# Altium PCB Tow_FOC.PcbDoc (part 1 of 3)
Units mil, origin at the board's own origin, x right, y up, seen from the top; angles counter-clockwise.
Board outline 3149.61 x 2165.35 mil, 4 copper layers (Top Layer, Layer 1, Layer 2, Bottom Layer), stack 23.756 mil thick; 186 components, 138 nets, 677 pads, 434 vias.
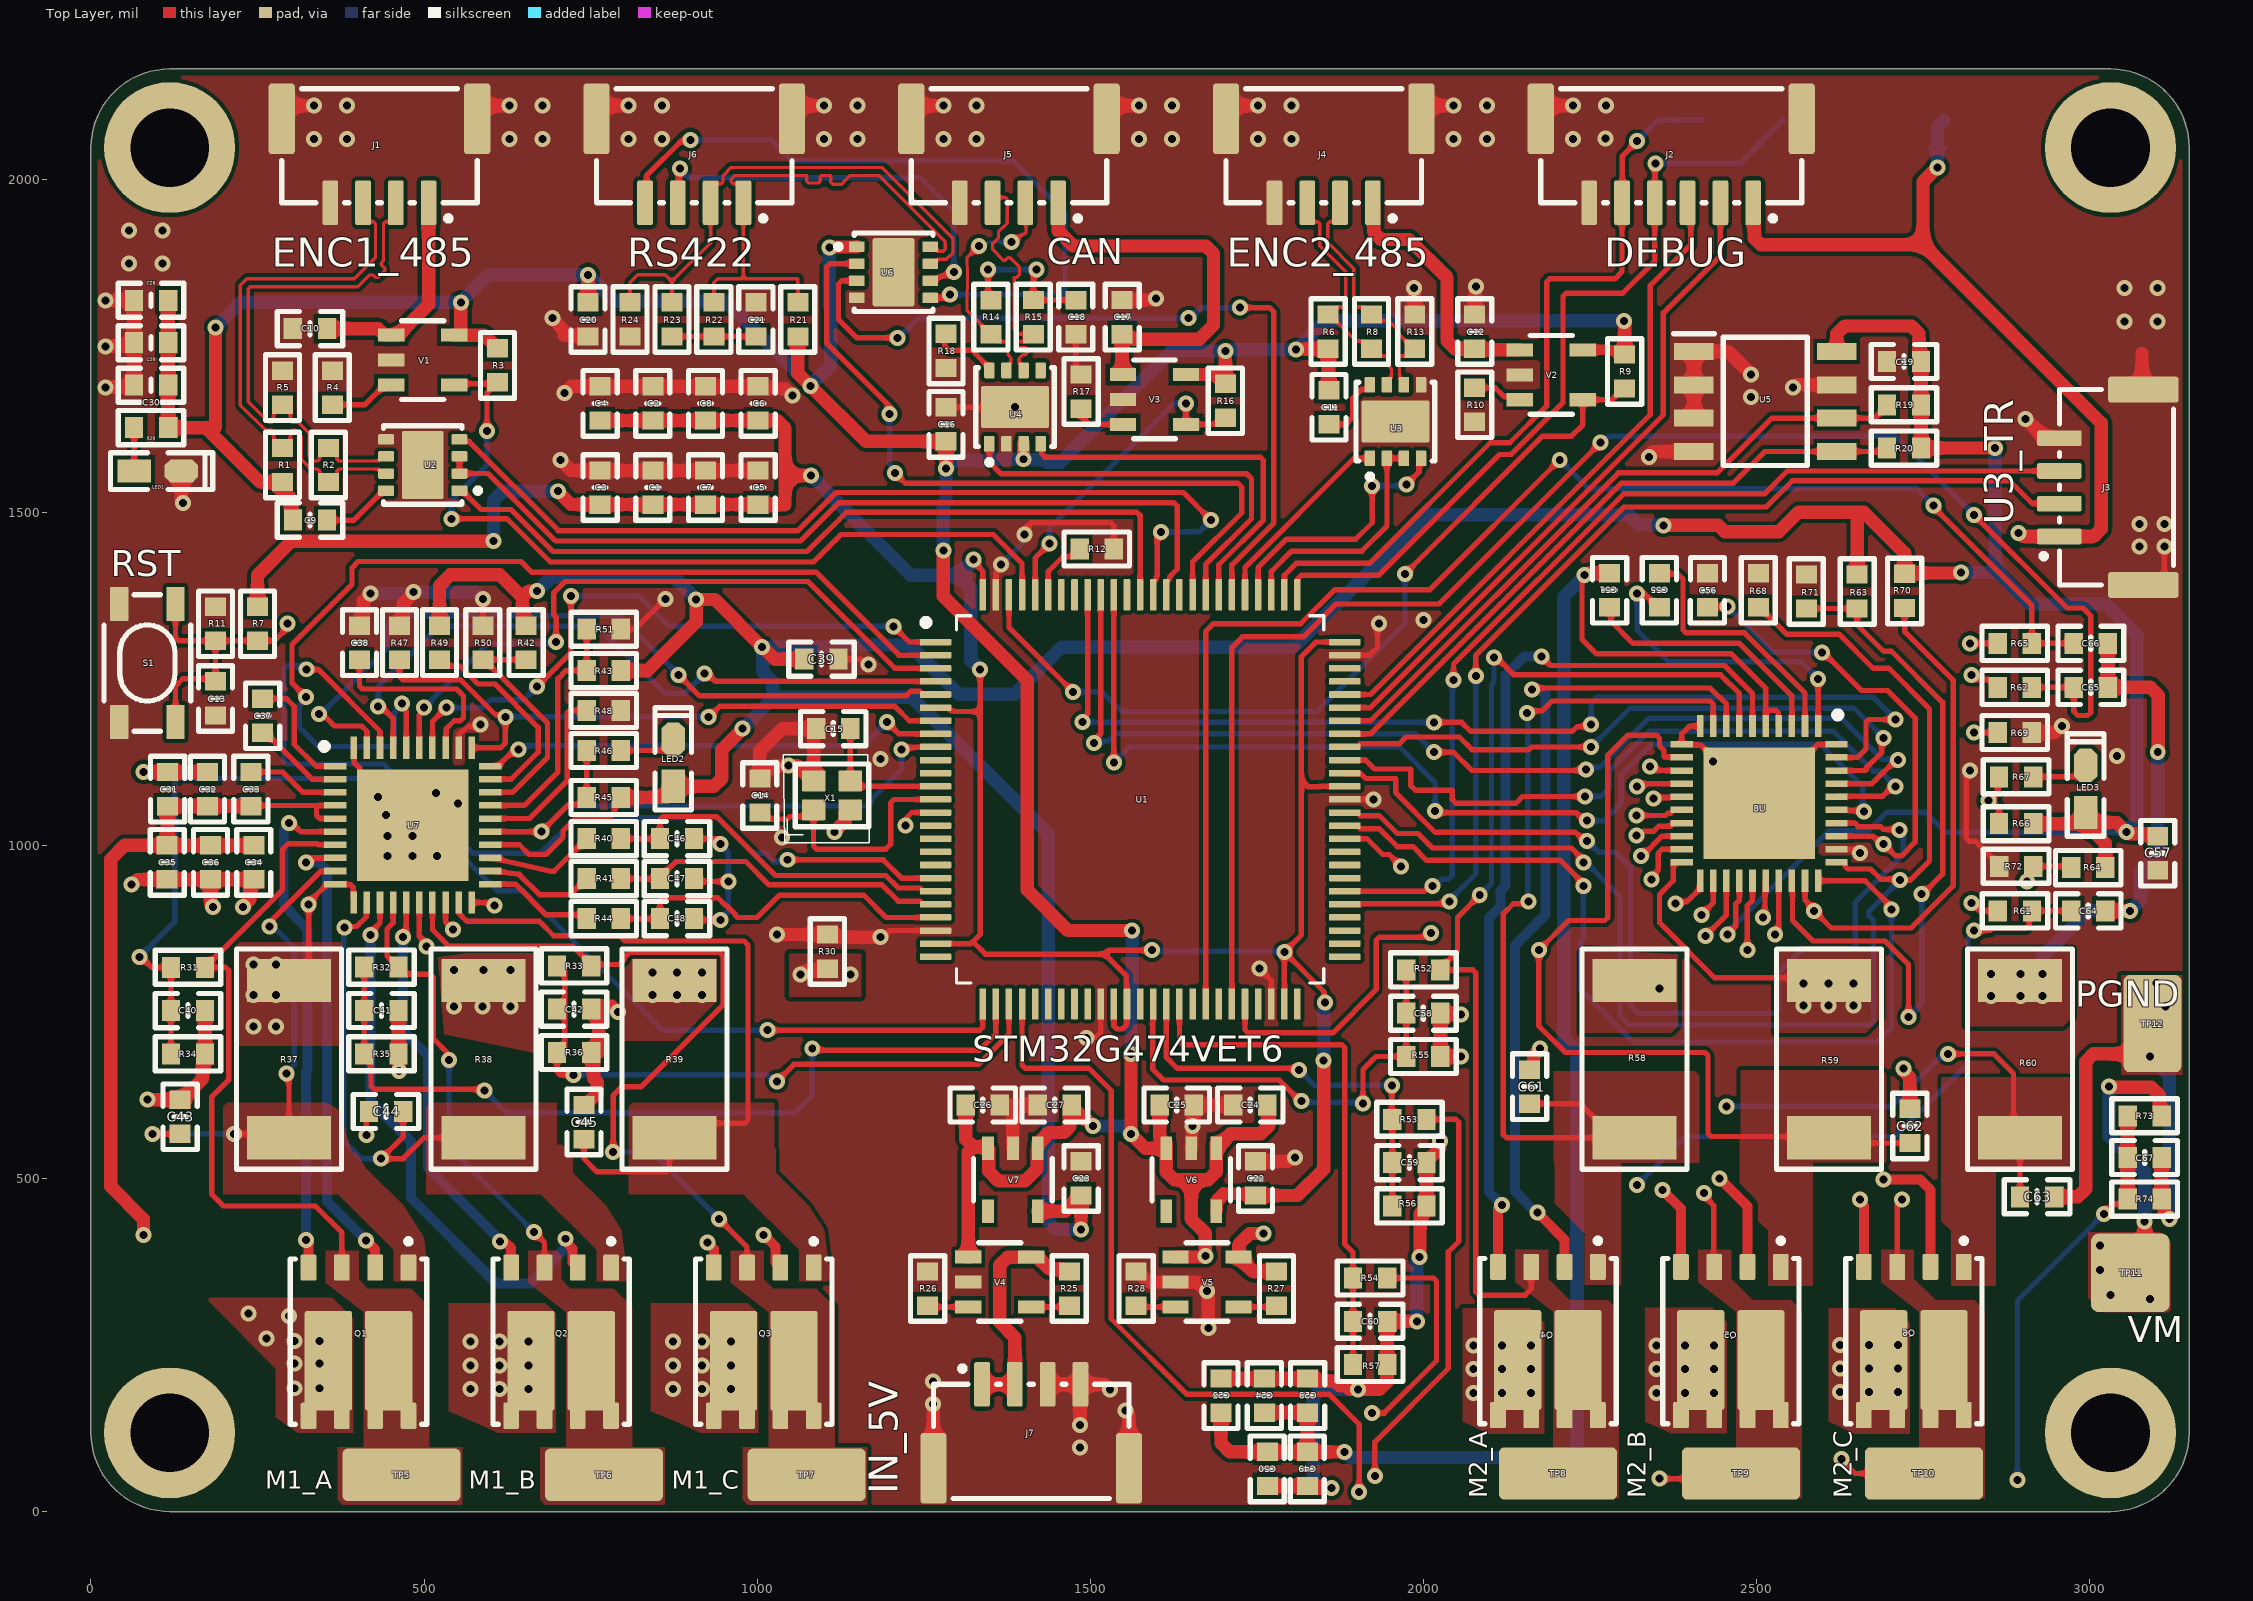
[diagram p0: Top Layer view]
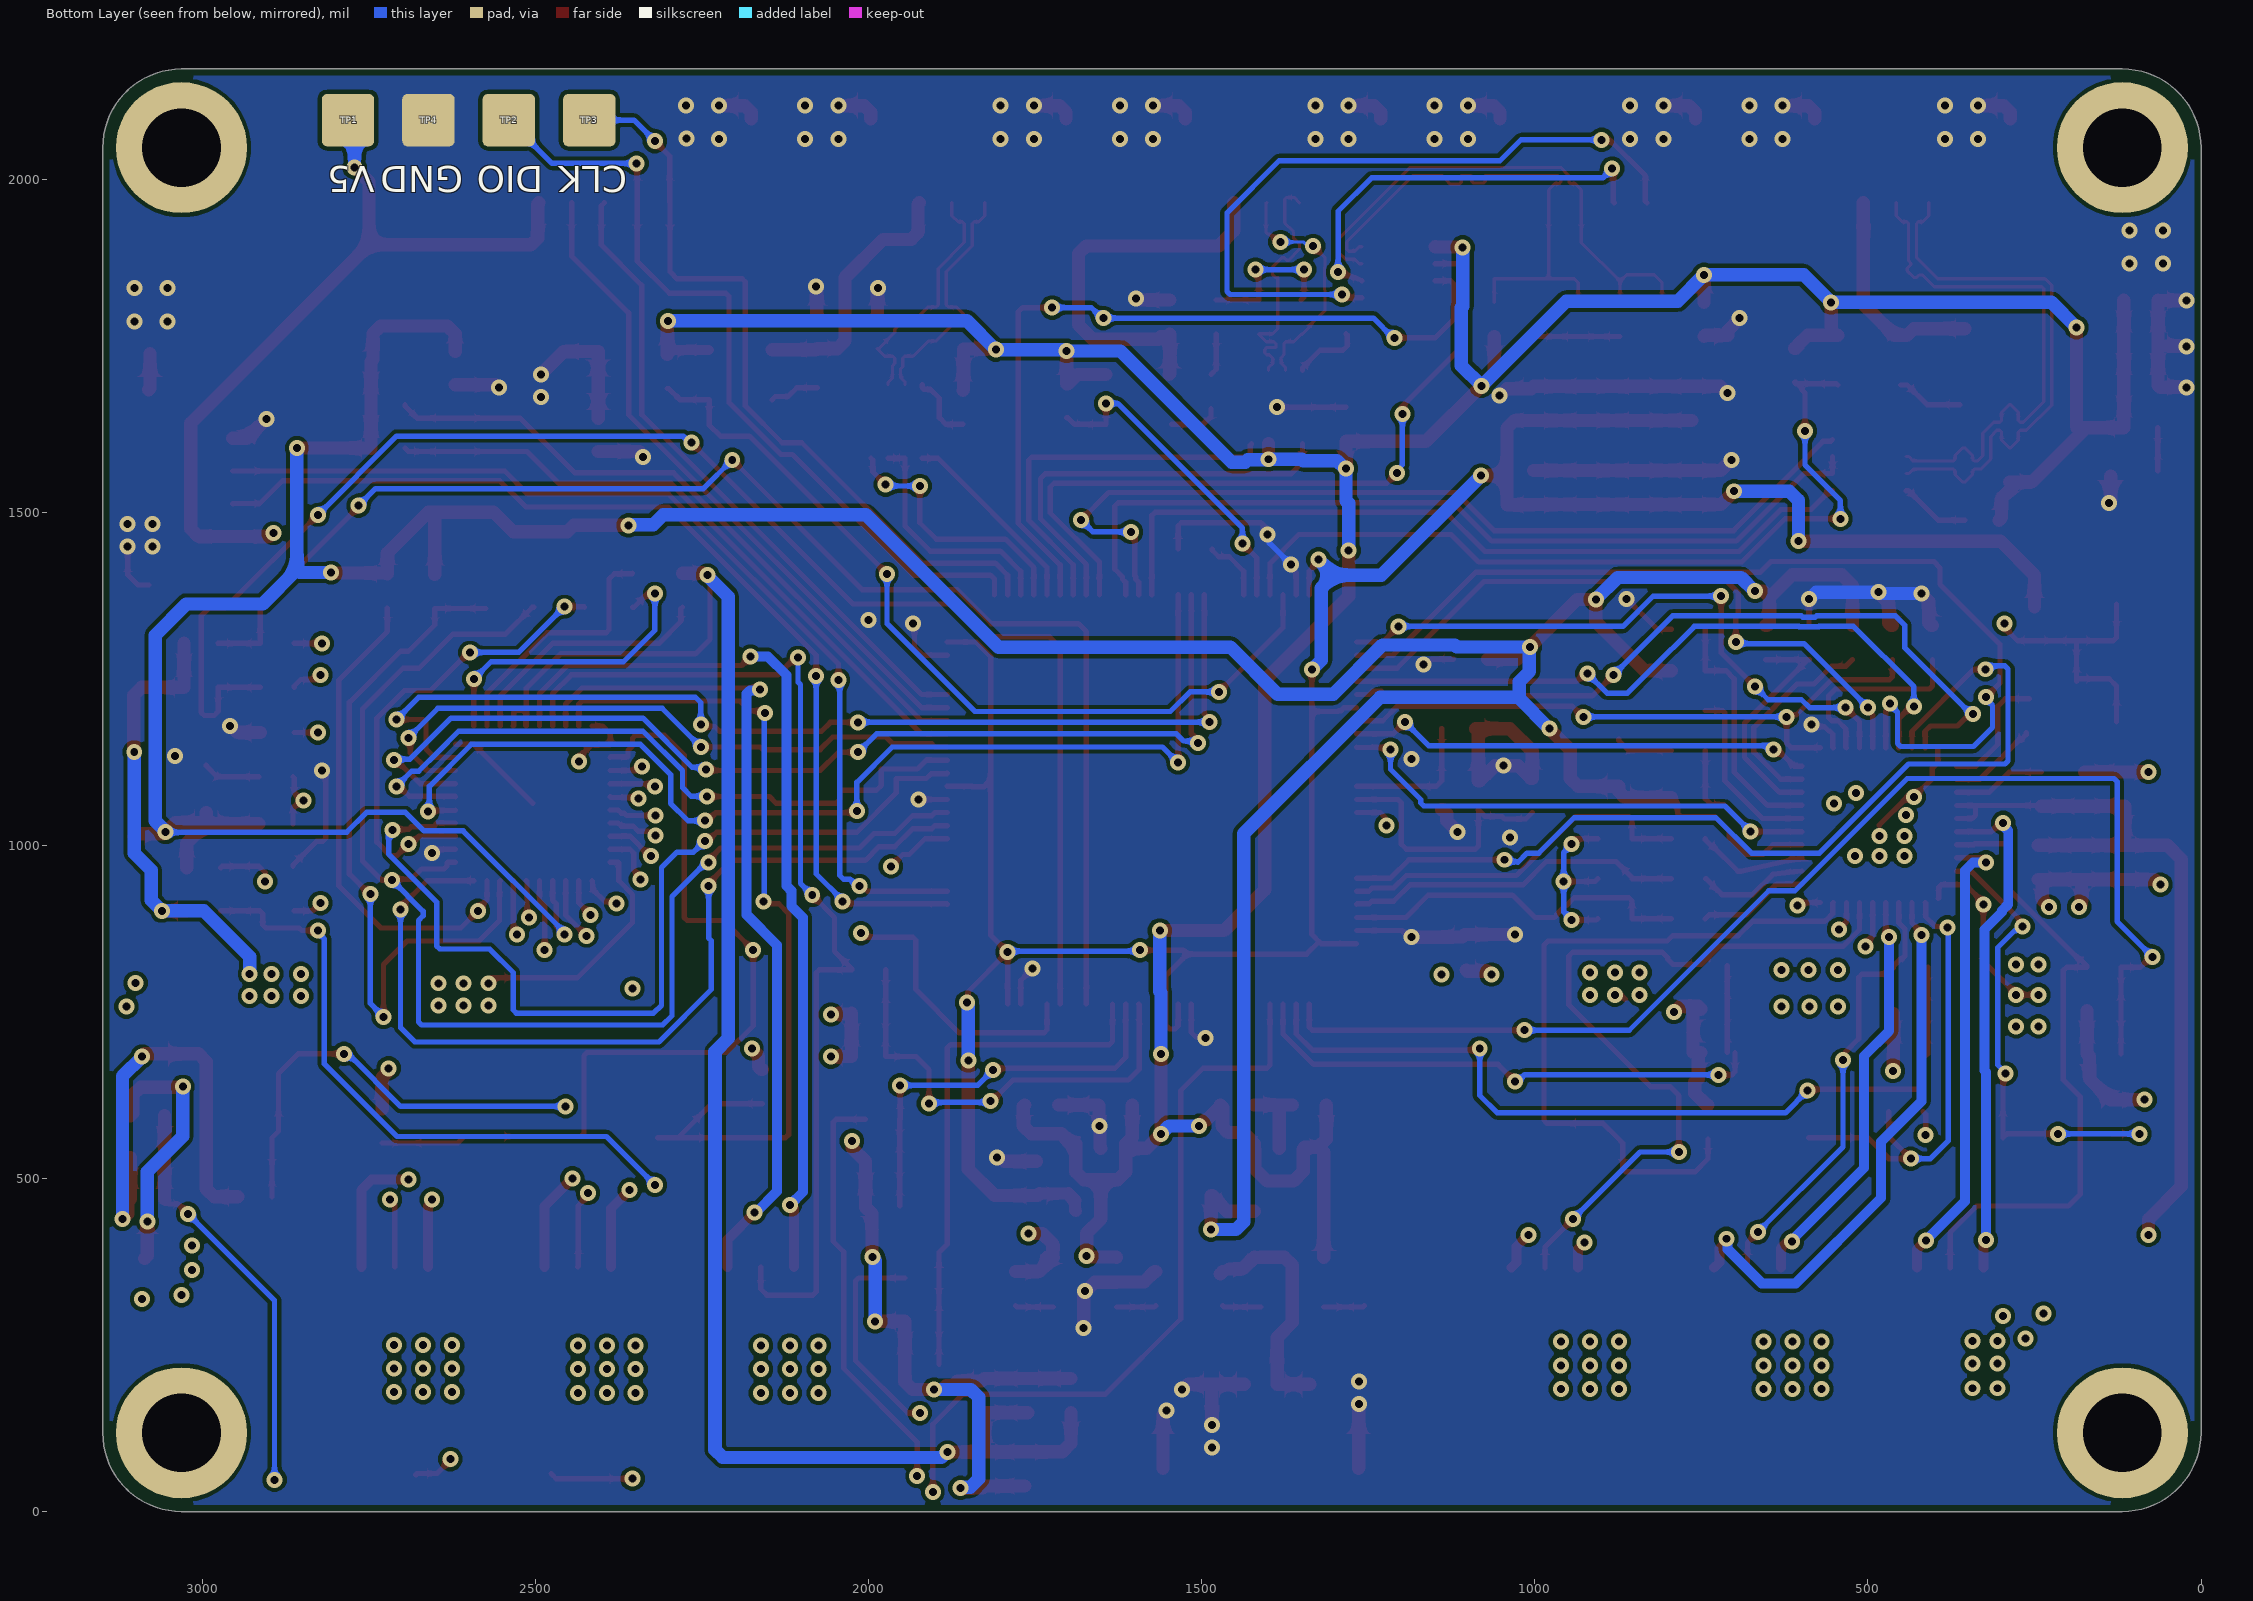
[diagram p1: Bottom Layer view, seen from below]
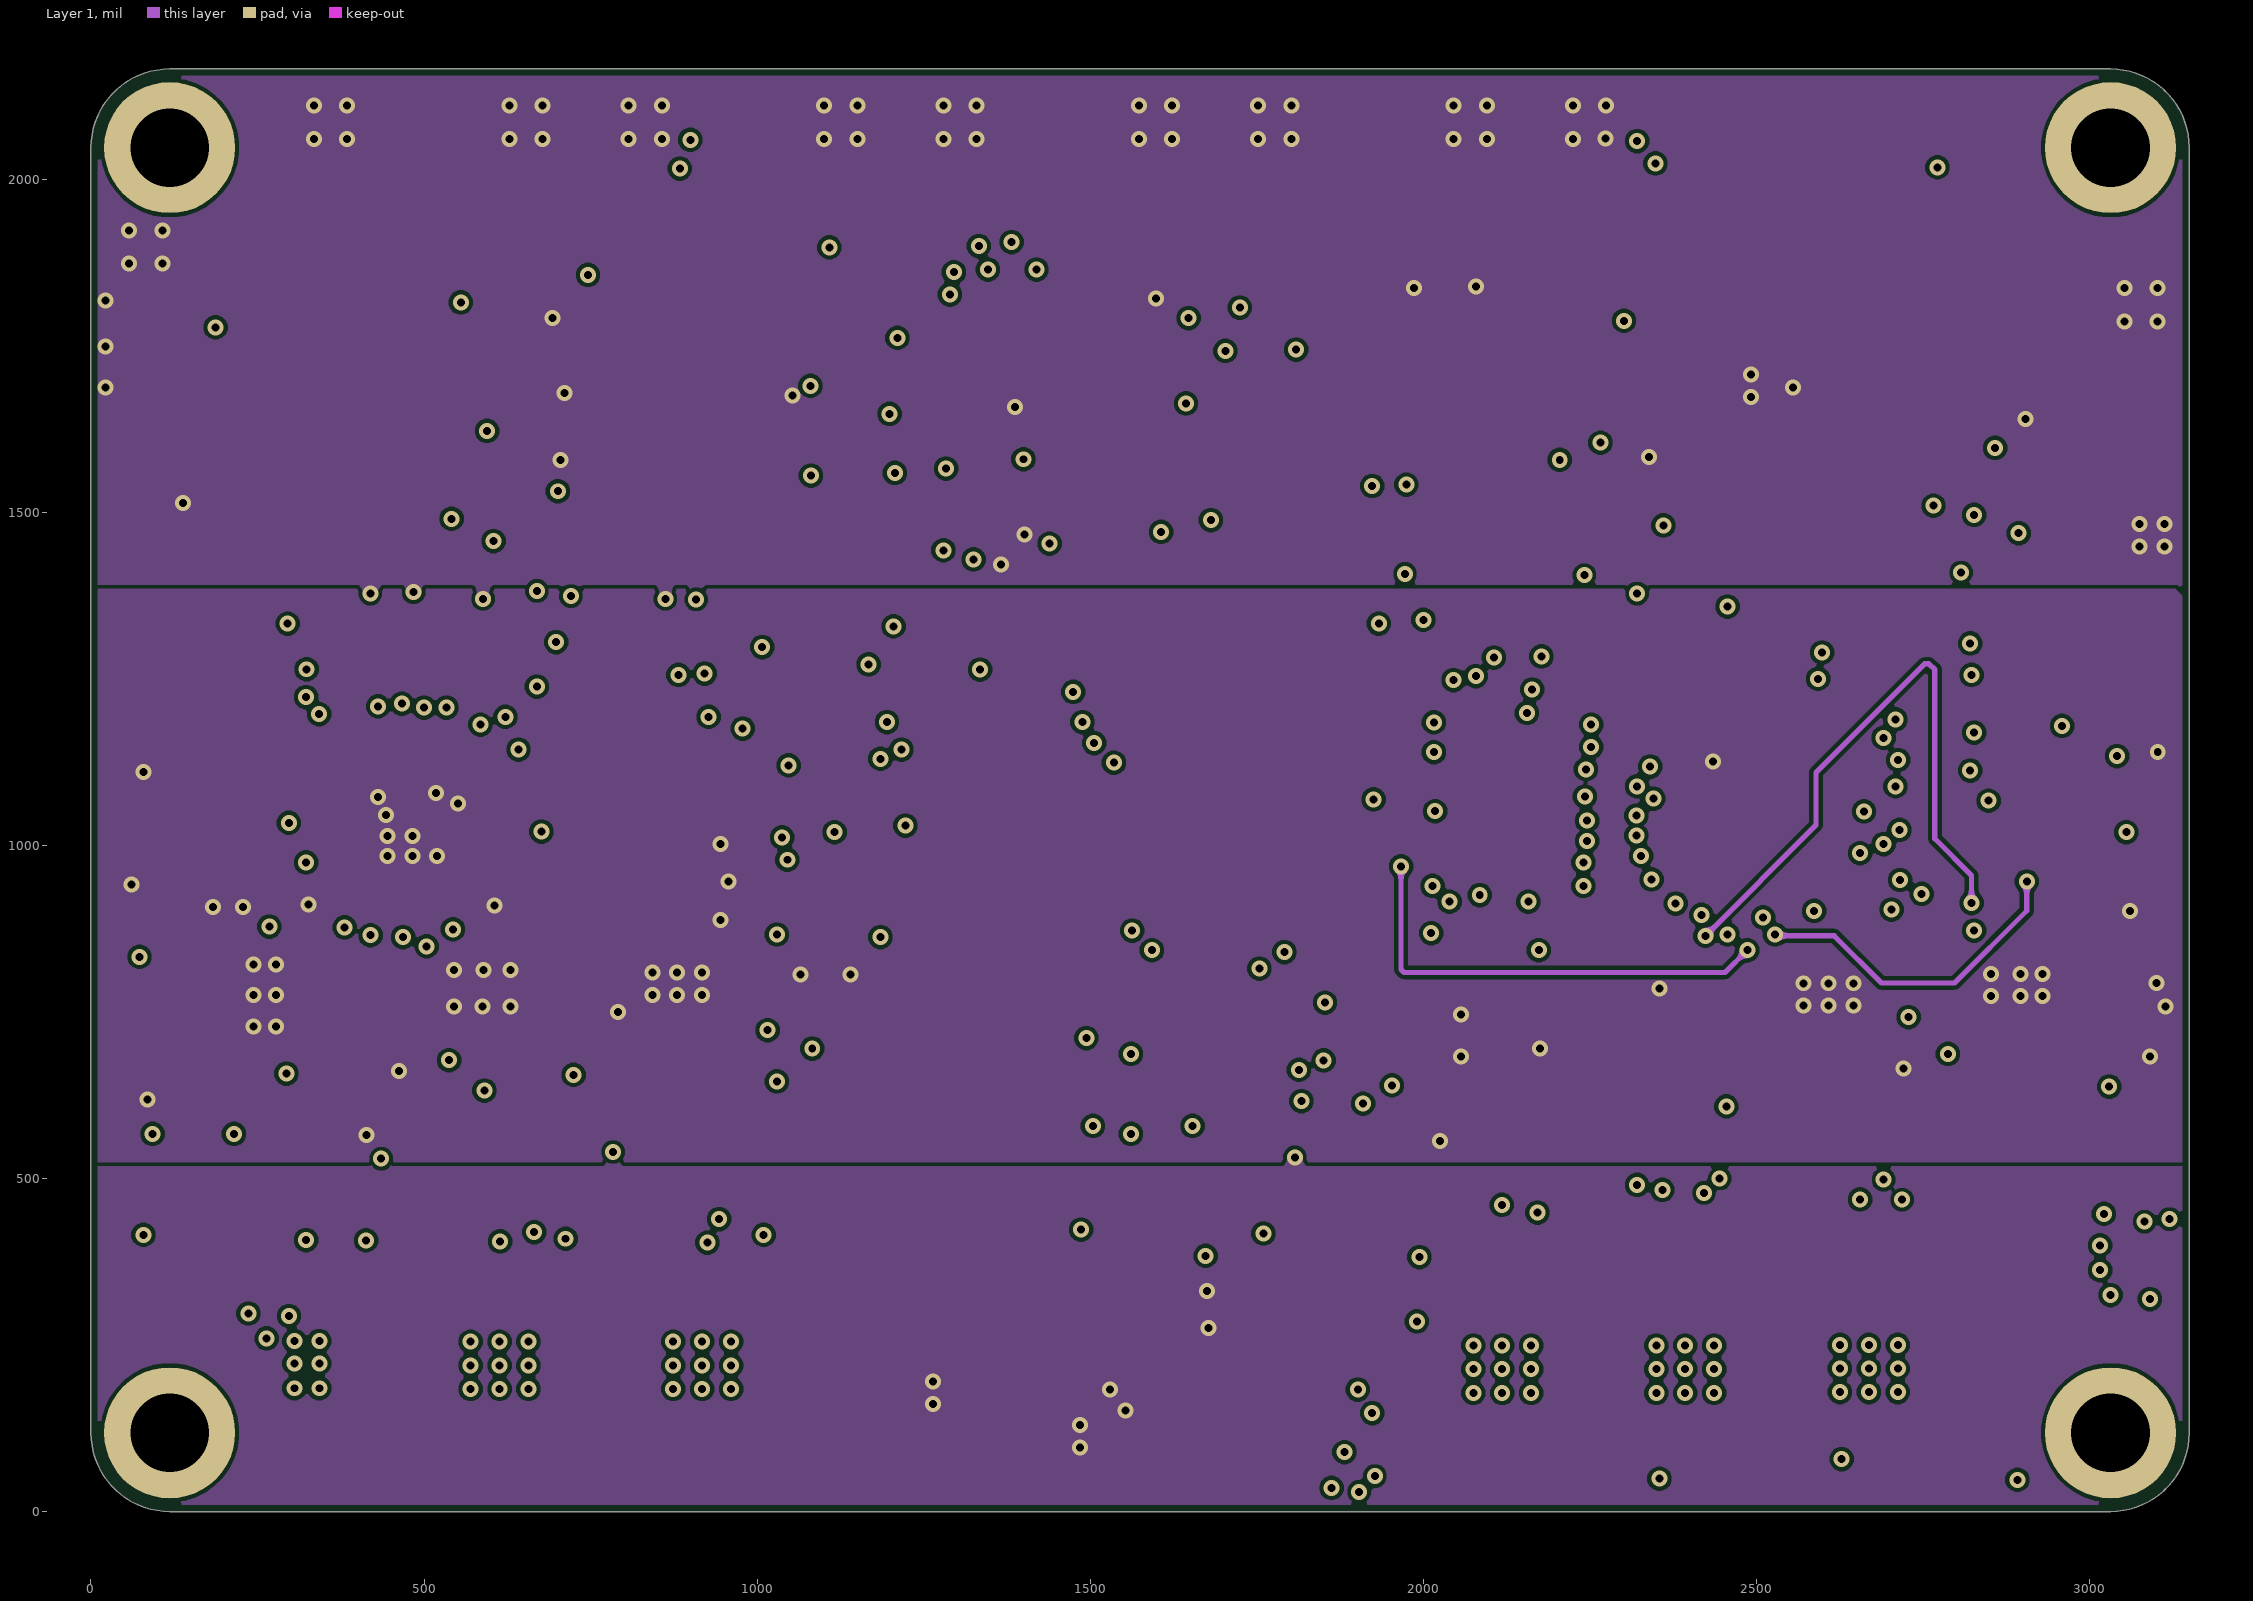
[diagram p2: Layer 1]
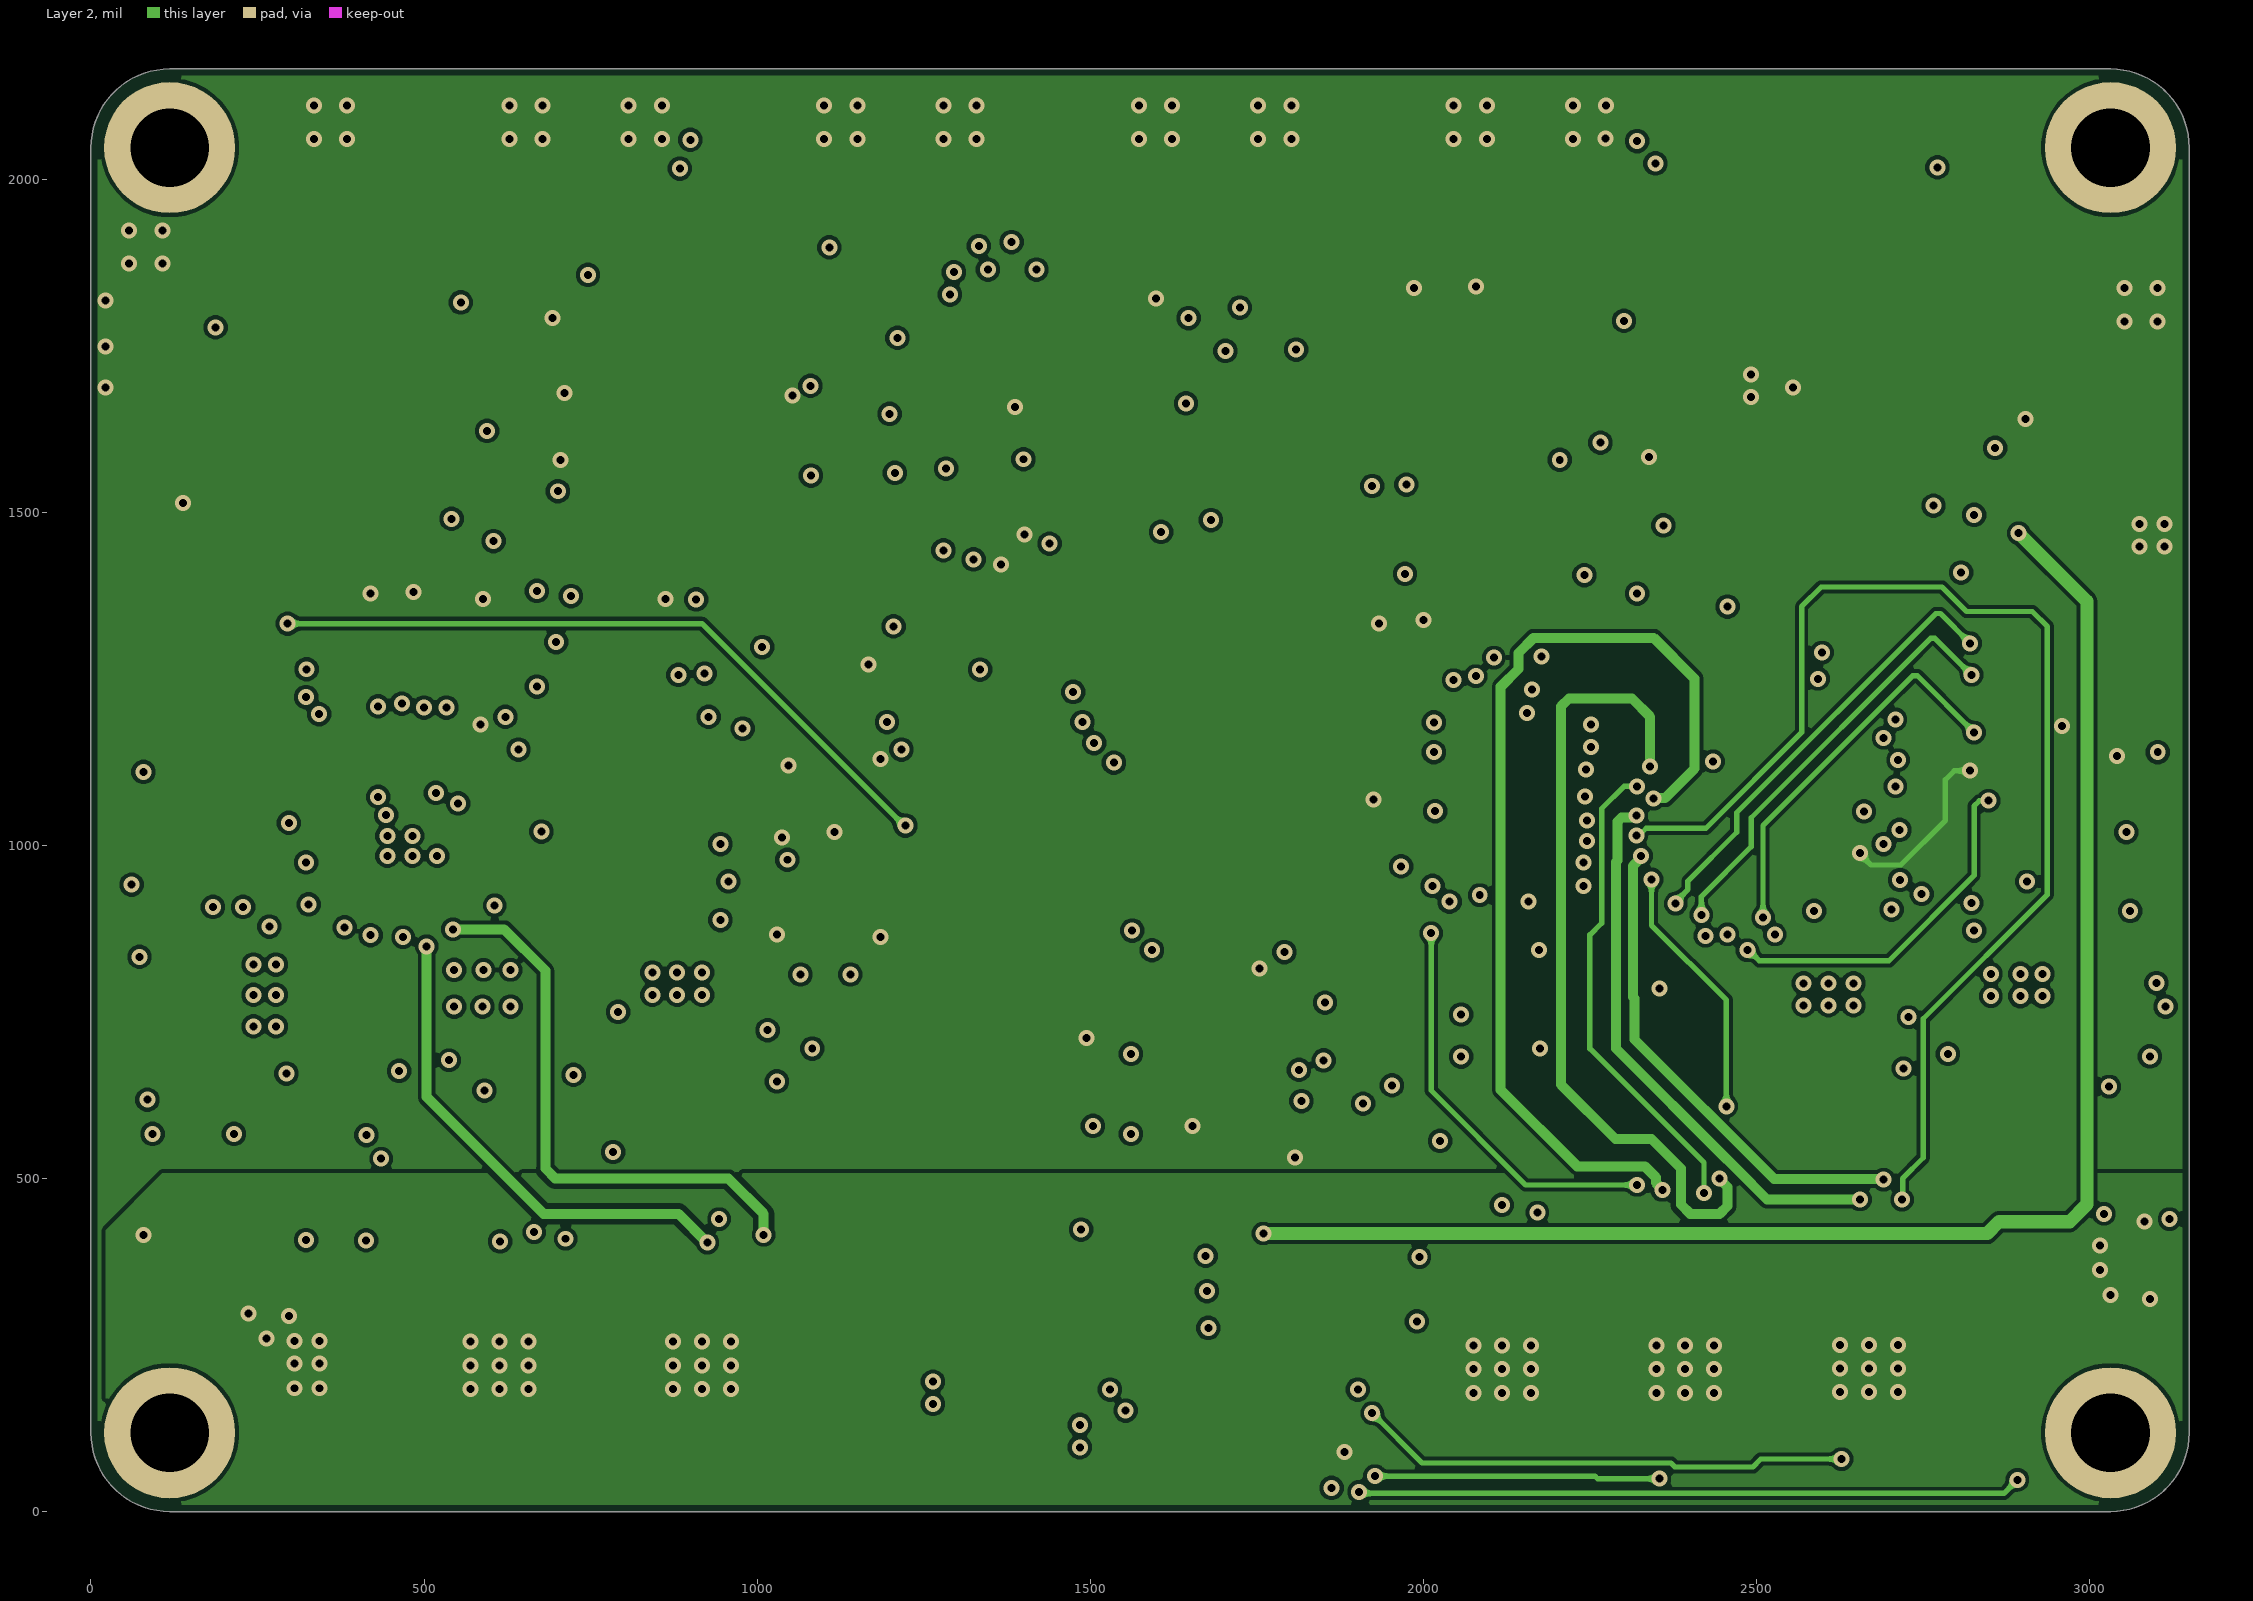
[diagram p3: Layer 2]
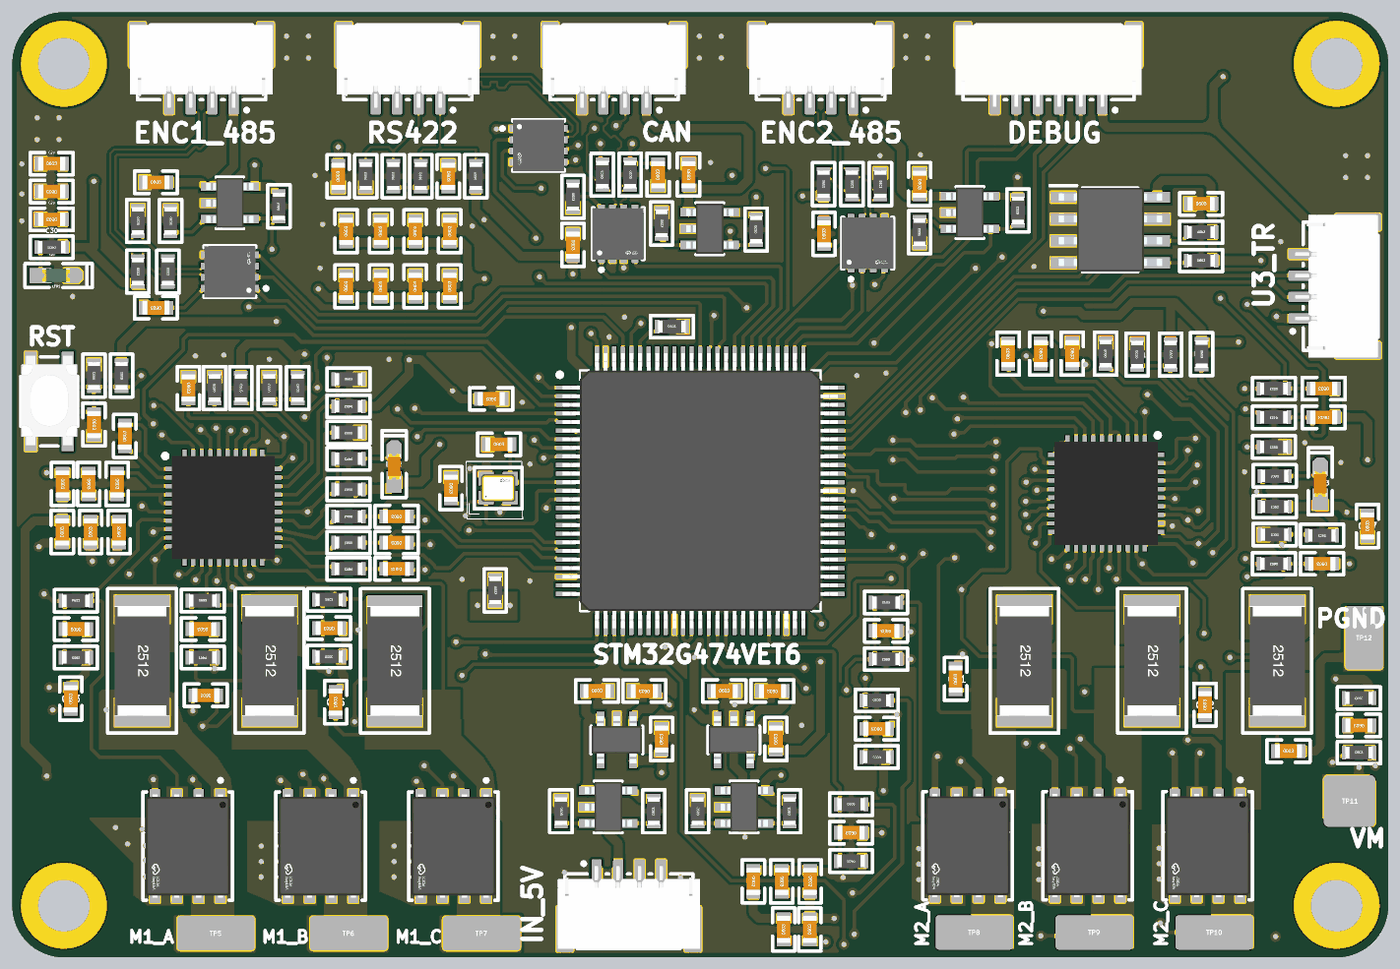
[diagram p6: 3D render of the assembled board from above, using the file's embedded part models]

## Layer stack, top to bottom
Top Solder: solder mask 0.4, Solder Resist, Dk 3.5
Top Layer: signal copper 1.4
Dielectric 0: dielectric 12.6, FR-4, Dk 4.8
Layer 1: signal copper 1.378
Dielectric 1: prepreg 2.8, PP-006, Dk 4.1
Layer 2: signal copper 1.378
Dielectric 2: prepreg 2.8, PP-006, Dk 4.1
Bottom Layer: signal copper 1.4
Bottom Solder: solder mask 0.4, Solder Resist, Dk 3.5

## Board outline
0,118.11 0,2047.24 cw(c118.11,2047.24) 118.11,2165.35 3031.5,2165.35 cw(c3031.5,2047.24) 3149.61,2047.24 3149.61,118.11 cw(c3031.5,118.11) 3031.5,0 118.11,0 cw(c118.11,118.11)

## Design rules (kind name [scope] priority, off if disabled: settings)
AcuteAngle [All] p1: minimum=4.50000000000000E+0001 checktracksonly=FALSE
BoardOutlineClearance [All] p1: gap=10 ignorepadtopadclearanceinfootprint=FALSE
Clearance Clearance_1 [All] p1: gap=6 ignorepadtopadclearanceinfootprint=TRUE
DiffPairsRouting [InDifferentialPairClass('My_Differ')] p1: maxlimit=7 minlimit=7 mostfreqgap=7 toplayer_minwidth=5 toplayer_maxwidth=5 toplayer_prefwidth=5 midlayer1_minwidth=5 midlayer1_maxwidth=5 midlayer1_prefwidth=5 midlayer2_minwidth=5 midlayer2_maxwidth=5 midlayer2_prefwidth=5 bottomlayer_minwidth=5 bottomlayer_maxwidth=5 bottomlayer_prefwidth=5 maxuncoupledlength=500
HoleSize [All] p1: absolutevalues=TRUE maxlimit=120 minlimit=1 maxpercent=80.000 minpercent=20.000
MatchedLengths ENC [InDifferentialPairClass('My_Differ')] p1: tolerance=10 checknetsindiffpair=TRUE checkdiffpairvsdiffpair=FALSE checkxsignals=FALSE checkothers=FALSE
MinimumSolderMaskSliver [All] p1: minsoldermaskwidth=1
PlaneClearance [All] p1: clearance=10
PolygonConnect [All] p1: connectstyle=Direct reliefconductorwidth=15 reliefentries=4 polygonreliefangle="90 Angle" airgapwidth=10
ReturnPath [All] p1: _gaplimit=0
RoutingVias [All] p1: holewidth=12 width=24 viastyle="Through Hole" minholewidth=12 minwidth=24 maxholewidth=12 maxwidth=24
SilkToSilkClearance [All] p1: silktosilkclearance=0
SilkToSolderMaskClearance [IsPad] p1: minsilkscreentomaskgap=0 clearancetoexposedcopper=TRUE
SolderMaskExpansion SolderMask-gk [IsVia] p1: expansion=2.5 istentingtop=TRUE
SolderMaskExpansion [All] p2: expansion=2.5 istentingtop=FALSE
SupplyNets "Schematic Supply Nets_11" [InNet('VCC_3V3_M1')] p1: voltage=0.000
SupplyNets "Schematic Supply Nets_10" [InNet('VCC_3V3_MCU')] p2: voltage=0.000
SupplyNets "Schematic Supply Nets_9" [InNet('PGND')] p3: voltage=0.000
SupplyNets "Schematic Supply Nets_8" [InNet('VCC_5V')] p4: voltage=0.000
SupplyNets "Schematic Supply Nets_7" [InNet('VCC_5V_DEG')] p5: voltage=0.000
SupplyNets "Schematic Supply Nets_6" [InNet('VM')] p6: voltage=0.000
SupplyNets "Schematic Supply Nets_5" [InNet('VCC_5V_ENC1')] p7: voltage=0.000
SupplyNets "Schematic Supply Nets_4" [InNet('VCC_5V_ENC2')] p8: voltage=0.000
SupplyNets "Schematic Supply Nets_2" [InNet('VCC_5V_CAN1')] p9: voltage=0.000
SupplyNets "Schematic Supply Nets_1" [InNet('VCC_5V_IN')] p10: voltage=0.000
SupplyNets "Schematic Supply Nets" [InNet('GND')] p11: voltage=0.000
UnRoutedNet [All] p1: checkbadconnections=TRUE
Width Width_Power [InNetClass('My_Class_POWR')] p1: maxlimit=20 minlimit=8 preferedwidth=20
Width [All] p2: maxlimit=20 minlimit=5 preferedwidth=8
23 further rules are at their usual default settings.

## Classes and differential pairs
net class My_Class_POWR: GND PGND VCC_3V3_M1 VCC_3V3_MCU VCC_5V VCC_5V_CAN1 VCC_5V_DEG VCC_5V_ENC1 VCC_5V_ENC2 VCC_5V_IN VM VSEN_VM
component class FOC_Power: C22 C23 C24 C25 C26 C27 C28 C29 C30 J7 LED1 R25 R26 R27 R28 R29 R30 V4 V5 V6 V7
component class FOC_MCU: C1 C2 C3 C4 C5 C6 C7 C8 C9 C10 C11 C12 C13 C14 C15 C16 C17 C18 C19 C20 C21 J1 J2 J3 J4 J5 J6 R1 R2 R3 R4 R5 R6 R7 R8 R9 R10 R11 R12 R13 R14 R15 R16 R17 R18 R19 R20 R21 R22 R23 R24 S1 TP1 TP2 TP3 TP4 U1 U2 U3 U4 U5 U6 V1 V2 V3 X1
component class FOC_Drive: C31 C32 C33 C34 C35 C36 C37 C38 C39 C40 C41 C42 C43 C44 C45 C46 C47 C48 C49 C50 C51 C52 C53 C54 C55 C56 C57 C58 C59 C60 C61 C62 C63 C64 C65 C66 C67 LED2 LED3 Q1 Q2 Q3 Q4 Q5 Q6 R31 R32 R33 R34 R35 R36 R37 R38 R39 R40 R41 R42 R43 R44 R45 R46 R47 R48 R49 R50 R51 R52 R53 R54 R55 R56 R57 R58 R59 R60 R61 R62 R63 R64 R65 R66 R67 R68 R69 R70 R71 R72 R73 R74 TP5 TP6 TP7 TP8 TP9 TP10 TP11 TP12 U7 U8

## Components (designator, comment, footprint, x,y, rotation, side; value= is the part's Value field where it differs from the comment)
C1 "0.1uF" "C 0603_L" 843.33,1537.09 r90 top
C2 "0.1uF" "C 0603_L" 843.33,1663.39 r90 top
C3 "0.1uF" "C 0603_L" 764.27,1537.09 r90 top
C4 "0.1uF" "C 0603_L" 764.27,1663.39 r90 top
C5 "0.1uF" "C 0603_L" 1001.44,1537.09 r90 top
C6 "0.1uF" "C 0603_L" 1001.44,1663.39 r90 top
C7 "0.1uF" "C 0603_L" 922.39,1537.09 r90 top
C8 "0.1uF" "C 0603_L" 922.39,1663.39 r90 top
C9 "0.1uF" "C 0603_L" 328.74,1488.19 r180 top
C10 "4.7uF" "C 0603_L" 328.74,1775.59 r0 top
C11 "0.1uF" "C 0603_L" 1858.27,1657.48 r90 top
C12 "4.7uF" "C 0603_L" 2077.09,1771.22 r270 top
C13 "0.1uF" "C 0603_L" 187.01,1220.47 r270 top
C14 "18pF" "C 0603_L" 1003.94,1074.8 r270 top
C15 "18pF" "C 0603_L" 1114.17,1175.2 r0 top
C16 "0.1uF" "C 0603_L" 1283.46,1631.89 r270 top
C17 "4.7uF" "C 0603_L" 1547.91,1792.87 r270 top
C18 "0.1uF" "C 0603_L" 1478.25,1792.87 r90 top
C19 "0.1uF" "C 0603_L" 2721.46,1726.26 r0 top
C20 "0.1uF" "C 0603_L" 746.06,1789.37 r90 top
C21 "0.1uF" "C 0603_L" 998.03,1789.37 r270 top
C22 "10uF" "C 0603_L" 1748.03,500 r90 top
C23 "10uF" "C 0603_L" 1486.22,500 r90 top
C24 "10uF" "C 0603_L" 1740.16,610.24 r180 top
C25 "10uF" "C 0603_L" 1629.92,610.24 r0 top
C26 "10uF" "C 0603_L" 1338.59,610.24 r0 top
C27 "10uF" "C 0603_L" 1446.85,610.24 r180 top
C28 "10uF" "C 0603_L" 90.2,1818.18 r0 top
C29 "10uF" "C 0603_L" 90.2,1754.43 r180 top
C30 "10uF" "C 0603_L" 90.2,1690.68 r180 top
C31 "4.7uF" "C 0603_L" 115,1084.41 r270 top
C32 "0.1uF" "C 0603_L" 175,1084.41 r270 top
C33 "1uF" "C 0603_L" 240,1084.41 r270 top
C34 "10nF/50v" "C 0603_L" 244.4,974.41 r90 top
C35 "10nF/50v" "C 0603_L" 114.4,974.41 r90 top
C36 "10nF/50v" "C 0603_L" 179.4,974.41 r90 top
C37 "47nF/50V" "C 0603_L" 257.71,1194.41 r90 top
C38 "1uF" "C 0603_L" 403.19,1304.26 r270 top
C39 "0.1uF" "C 0603_L" 1096.46,1279.53 r180 top
C40 "0.1uF/50v" "C 0603_L" 145.67,751.93 r180 top
C41 "0.1uF/50v" "C 0603_L" 436.02,752.12 r180 top
C42 "0.1uF/50v" "C 0603_L" 725.15,754.09 r180 top
C43 "1nF" "C 0603_L" 133.86,592.52 r90 top
C44 "1nF" "C 0603_L" 442.91,600.39 r180 top
C45 "1nF" "C 0603_L" 740.16,584.65 r90 top
C46 "2.2nF" "C 0603_L" 879.68,1010 r180 top
C47 "2.2nF" "C 0603_L" 879.68,950 r180 top
C48 "2.2nF" "C 0603_L" 879.68,890 r180 top
C49 "4.7uF" "C 0603_L" 1825.75,63.98 r90 top
C50 "0.1uF" "C 0603_L" 1765.75,63.98 r90 top
C51 "1uF" "C 0603_L" 2279.53,1383 r90 top
C52 "10nF/50v" "C 0603_L" 1696.34,173.98 r270 top
C53 "10nF/50v" "C 0603_L" 1826.34,173.98 r270 top
C54 "10nF/50v" "C 0603_L" 1761.34,173.98 r270 top
C55 "47nF/50V" "C 0603_L" 2354.33,1383 r270 top
C56 "1uF" "C 0603_L" 2426.39,1383 r270 top
C57 "0.1uF" "C 0603_L" 3102.36,988.19 r90 top
C58 "0.1uF/50v" "C 0603_L" 2000,747.99 r180 top
C59 "0.1uF/50v" "C 0603_L" 1979.09,523.78 r180 top
C60 "0.1uF/50v" "C 0603_L" 1920.04,285.59 r180 top
C61 "1nF" "C 0603_L" 2159.45,637.8 r90 top
C62 "1nF" "C 0603_L" 2730.31,578.74 r90 top
C63 "1nF" "C 0603_L" 2921.26,472.44 r0 top
C64 "2.2nF" "C 0603_L" 2998.03,901.58 r180 top
C65 "2.2nF" "C 0603_L" 3001.97,1237.17 r180 top
C66 "2.2nF" "C 0603_L" 3001.97,1303.16 r180 top
C67 "0.1uF" "C 0603_L" 3082.67,531.49 r180 top
J1 "GH1.25-4PWB" GH1.25-4PWB 433.07,2027.56 r180 top locked
J2 "GH1.25-6PWB" GH1.25-6PWB 2372.05,2027.56 r180 top locked
J3 "GH1.25-4PWB" GH1.25-4PWB 3017.72,1537.4 r90 top
J4 "GH1.25-4PWB" GH1.25-4PWB 1850.39,2027.56 r180 top locked
J5 "GH1.25-4PWB" GH1.25-4PWB 1377.95,2027.56 r180 top locked
J6 "GH1.25-4PWB" GH1.25-4PWB 905.51,2027.56 r180 top locked
J7 "GH1.25-4PWB" GH1.25-4PWB 1411.42,127.95 r0 top
LED1 "GREEN" LED_0603G 100.2,1561.77 r0 top
LED2 "RED" LED_0603R 874.02,1124.02 r90 top
LED3 "RED" LED_0603R 2994.09,1084.65 r90 top
Q1 "NMOS" DFN-8_L5.8-W4.9-P1.27-LS6.0-BL 401.57,254.92 r270 top
Q2 "NMOS" DFN-8_L5.8-W4.9-P1.27-LS6.0-BL 705.71,254.92 r270 top
Q3 "NMOS" DFN-8_L5.8-W4.9-P1.27-LS6.0-BL 1009.84,254.92 r270 top
Q4 "NMOS" DFN-8_L5.8-W4.9-P1.27-LS6.0-BL 2187.01,255.91 r270 top
Q5 "NMOS" DFN-8_L5.8-W4.9-P1.27-LS6.0-BL 2461.61,255.91 r270 top
Q6 "NMOS" DFN-8_L5.8-W4.9-P1.27-LS6.0-BL 2736.22,255.91 r270 top
R1 "3.3K" "R 0603_L" 287.4,1570.86 r270 top
R2 "220R" "R 0603_L" 356.3,1570.86 r270 top
R3 "10K" "R 0603_L" 610.24,1720.47 r90 top
R4 "22K" "R 0603_L" 362.2,1687.01 r270 top
R5 "3.3K" "R 0603_L" 287.4,1687.01 r270 top
R6 "3.3K" "R 0603_L" 1857.09,1771.22 r270 top
R7 "10K" "R 0603_L" 250,1332.68 r270 top
R8 "220R" "R 0603_L" 1922.09,1771.22 r270 top
R9 "10K" "R 0603_L" 2302.09,1711.22 r90 top
R10 "22K" "R 0603_L" 2077.09,1661.22 r90 top
R11 "10K" "R 0603_L" 187.01,1332.68 r90 top
R12 "10K" "R 0603_L" 1509.84,1444.88 r0 top
R13 "3.3K" "R 0603_L" 1987.09,1771.22 r270 top
R14 "60.4R" "R 0603_L" 1350.75,1792.87 r90 top
R15 "60.4R" "R 0603_L" 1414.5,1792.87 r270 top
R16 "10K" "R 0603_L" 1702.76,1667.32 r90 top
R17 "13K" "R 0603_L" 1486.22,1681.1 r270 top
R18 "10K" "R 0603_L" 1283.46,1742.13 r270 top
R19 "2.2K" "R 0603_L" 2721.46,1661.26 r0 top
R20 "2.2K" "R 0603_L" 2721.46,1596.26 r0 top
R21 "1.2K" "R 0603_L" 1061.02,1789.37 r90 top
R22 "60.4K" "R 0603_L" 935.04,1789.37 r90 top
R23 "60.4K" "R 0603_L" 872.05,1789.37 r90 top
R24 "1.2K" "R 0603_L" 809.06,1789.37 r90 top
R25 "10K" "R 0603_L" 1468.5,334.65 r90 top
R26 "3.3K" "R 0603_L" 1255.9,334.65 r270 top
R27 "10K" "R 0603_L" 1779.53,334.65 r90 top
R28 "3.3K" "R 0603_L" 1568.9,334.65 r270 top
R29 "2K" "R 0603_L" 90.2,1626.93 r180 top
R30 "0R" "R 0603_L" 1105.32,840.55 r270 top
R31 "82K" "R 0603_L" 145.67,816.93 r0 top
R32 "82K" "R 0603_L" 436.02,817.12 r0 top
R33 "82K" "R 0603_L" 725.15,819.09 r0 top
R34 "7.5K" "R 0603_L" 145.67,686.93 r180 top
R35 "7.5K" "R 0603_L" 436.02,687.12 r180 top
R36 "7.5K" "R 0603_L" 725.15,689.09 r180 top
R37 "0.005R" "R 2512_L" 297.24,679.13 r270 top
R38 "0.005R" "R 2512_L" 589.17,679.13 r270 top
R39 "0.005R" "R 2512_L" 875.98,679.13 r270 top
R40 "51R" "R 0603_L" 769.68,1010 r180 top
R41 "51R" "R 0603_L" 769.68,950 r180 top
R42 "75K" "R 0603_L" 653.19,1304.26 r270 top
R43 "75K" "R 0603_L" 769.68,1262.29 r180 top
R44 "51R" "R 0603_L" 769.68,890 r180 top
R45 "10K" "R 0603_L" 769.68,1071.82 r180 top
R46 "600R" "R 0603_L" 769.68,1142.29 r180 top
R47 "10K" "R 0603_L" 463.19,1304.26 r90 top
R48 "0R" "R 0603_L" 769.68,1202.29 r180 top
R49 "0R" "R 0603_L" 523.19,1304.26 r270 top
R50 "75K" "R 0603_L" 588.19,1304.26 r90 top
R51 "75K" "R 0603_L" 769.68,1324.43 r0 top
R52 "82K" "R 0603_L" 2000,812.99 r0 top
R53 "82K" "R 0603_L" 1979.09,588.78 r0 top
R54 "82K" "R 0603_L" 1920.04,350.59 r0 top
R55 "7.5K" "R 0603_L" 2000,682.99 r180 top
R56 "7.5K" "R 0603_L" 1979.09,458.78 r180 top
R57 "7.5K" "R 0603_L" 1920.04,220.59 r180 top
R58 "0.005R" "R 2512_L" 2316.93,679.13 r270 top
R59 "0.005R" "R 2512_L" 2608.86,679.13 r270 top
R60 "0.005R" "R 2512_L" 2895.67,679.13 r270 top
R61 "51R" "R 0603_L" 2888.03,901.58 r180 top
R62 "51R" "R 0603_L" 2887.8,1237.17 r180 top
R63 "75K" "R 0603_L" 2651.22,1381.03 r270 top
R64 "75K" "R 0603_L" 2998.03,966.53 r180 top
R65 "51R" "R 0603_L" 2887.8,1303.15 r180 top
R66 "10K" "R 0603_L" 2889.76,1032.45 r180 top
R67 "600R" "R 0603_L" 2889.76,1102.92 r180 top
R68 "10K" "R 0603_L" 2502.77,1383 r90 top
R69 "0R" "R 0603_L" 2887.8,1169.29 r180 top
R70 "0R" "R 0603_L" 2722.44,1381.89 r270 top
R71 "75K" "R 0603_L" 2574.83,1381.03 r90 top
R72 "75K" "R 0603_L" 2889.76,968.5 r180 top
R73 "82K" "R 0603_L" 3082.67,593.99 r180 top
R74 "7.5K" "R 0603_L" 3082.67,468.99 r0 top
S1 "TS-1089S-02526" SMD_TS-1089S 84.65,1273.62 r90 top
TP1 "" TP_RECT_2x2#1 2781.5,2088.58 r180 bottom
TP2 "" TP_RECT_2x2#1 2540.03,2088.58 r180 bottom
TP3 "" TP_RECT_2x2#1 2419.29,2088.58 r180 bottom
TP4 "" TP_RECT_2x2#1 2660.76,2088.58 r180 bottom
TP5 "M1_SHA" TP_RECT_2x2#2 466,55.12 r0 top
TP6 "M1_SHB" TP_RECT_2x2#2 770.14,55.12 r0 top
TP7 "M1_SHC" TP_RECT_2x2#2 1074.27,55.12 r0 top
TP8 "M2_SHA" TP_RECT_2x2#2 2202.22,57.09 r0 top
TP9 "M2_SHB" TP_RECT_2x2#2 2476.83,57.09 r0 top
TP10 "M2_SHC" TP_RECT_2x2#2 2751.44,57.09 r0 top
TP11 "VM" TP_RECT_2x2#3 3061.02,358.27 r0 top
TP12 "PGND" TP_RECT_2x2#4 3094.49,732.28 r0 top
U1 "STM32G474VET6" LQFP100_L 1574.8,1068.9 r0 top
U2 "CS48520D" DFN65P300X75-9N 498.03,1570.87 r90 top
U3 "CS48520D" DFN65P300X75-9N 1958.11,1636.1 r0 top
U4 "CA-IF1044D-Q1" DFN65P300X75-9N 1387.01,1657.76 r0 top
U5 "FM24V02A-GTR" SOIC-8N 2513.27,1666.26 r0 top
U6 "CA-IF4820FD" DFN65P300X75-9N 1204.72,1860.24 r270 top
U7 "DRV8323H" QFN50P600X600X80-41N-D 483.03,1030.36 r0 top
U8 "DRV8323H" QFN50P600X600X80-41N-D 2503.94,1062.99 r270 top
V1 "MT9700" SOT-23-5 498.03,1728.35 r270 top
V2 "MT9700" SOT-23-5 2192.09,1706.22 r270 top
V3 "MT9700" SOT-23-5 1596.46,1669.29 r270 top
V4 "MT9700" SOT-23-5 1364.17,344.49 r270 top
V5 "MT9700" SOT-23-5 1675.2,344.49 r270 top
V6 "ME6217C33M5G" SOT-23-5L 1651.57,498.03 r180 top
V7 "ME6217C33M5G" SOT-23-5L 1383.86,498.03 r180 top
X1 "16M" "OSC 2016-4P" 1112.28,1075 r0 top

## Footprints (in the part's own frame and the unit in brackets; to place one, negate y for a bottom-side part, rotate by r counter-clockwise, add the part's x,y. Pads: shape width x height; smd on the part's side, far side on the other; paste and mask are expansions set on the pad)
"C 0603_L" [mm] "无极性贴片电容                                       淘宝ID:黄晶宝石"
  rect 0.7x0.8 smd: 1(-0.65,0) 2(0.65,0)
  silkscreen extent -1.25,-0.65 1.25,0.65, body extent -0.8,-0.41 0.8,0.41, height 0.81
DFN65P300X75-9N [mm]
  rrect20% 0.4x0.6 smd: 1(-0.975,-1.4) 2(-0.325,-1.4) 3(0.325,-1.4) 4(0.975,-1.4) 5(0.975,1.4) 6(0.325,1.4) 7(-0.325,1.4) 8(-0.975,1.4)
  rrect10% 2.6x1.6 smd: 9(0,0)
  silkscreen extent -1.5,-2.2 1.5,1.5, body extent -1.5,-1.51 1.5,1.51, height 0.76
DFN-8_L5.8-W4.9-P1.27-LS6.0-BL [mm]
  rrect20% 1x0.6 smd: 1(-2.825,1.905) 2(-2.825,0.635) 3(-2.825,-0.635) 4(-2.825,-1.905) 5(2.825,-1.905) 6(2.825,-0.635) 7(2.825,0.635) 8(2.825,1.905)
  rrect10% 3.8x1.8 smd: 6(0.725,-1.15) 8(0.725,1.15)
  silkscreen extent -3.92,-2.6 3.15,2.6, body extent -3,-2.46 3,2.46, height 1.02
GH1.25-4PWB [mm] "GH1.25-4P 卧贴"
  rrect25% 0.6x1.7 smd: 1(-1.875,1.6) 2(-0.625,1.6) 3(0.625,1.6) 4(1.875,1.6)
  rrect25% 1x2.7 smd: G1(-3.725,-1.6) G2(3.725,-1.6)
  silkscreen extent -3.72,-2.75 3.73,2.3, body extent -4.15,-2.75 4.15,2.1, height 4.1
GH1.25-6PWB [mm] "GH1.25-6P 卧贴"
  rrect25% 0.6x1.7 smd: 1(-3.125,1.6) 2(-1.875,1.6) 3(-0.625,1.6) 4(0.625,1.6) 5(1.875,1.6) 6(3.125,1.6)
  rrect25% 1x2.7 smd: G1(-4.975,-1.6) G2(4.975,-1.6)
  silkscreen extent -4.97,-2.75 4.97,2.3, body extent -5.4,-2.73 5.4,2.02, height 4.27
LED_0603G [mil]
  rect 50x35 smd: 1(-35.43,0)
  oct 50x35 smd: 2(35.43,0)
  silkscreen extent -71,-28 83,28, body extent -32,-16 32,16, height 24
LED_0603R [mil]
  rect 50x35 smd: 1(-35.43,0)
  oct 50x35 smd: 2(35.43,0)
  silkscreen extent -71,-28 83,28, body extent -29,-15 29,15, height 22
LQFP100_L [mm]
  rrect25% 1.2x0.25 smd: 1(-7.8,6) 2(-7.8,5.5) 3(-7.8,5) 4(-7.8,4.5) 5(-7.8,4) 6(-7.8,3.5) 7(-7.8,3) 8(-7.8,2.5) 9(-7.8,2) 10(-7.8,1.5) 11(-7.8,1) 12(-7.8,0.5) 13(-7.8,0) 14(-7.8,-0.5) 15(-7.8,-1) 16(-7.8,-1.5) 17(-7.8,-2) 18(-7.8,-2.5) 19(-7.8,-3) 20(-7.8,-3.5) 21(-7.8,-4) 22(-7.8,-4.5) 23(-7.8,-5) 24(-7.8,-5.5) 25(-7.8,-6) 51(7.8,-6) 52(7.8,-5.5) 53(7.8,-5) 54(7.8,-4.5) 55(7.8,-4) 56(7.8,-3.5) 57(7.8,-3) 58(7.8,-2.5) 59(7.8,-2) 60(7.8,-1.5) 61(7.8,-1) 62(7.8,-0.5) 63(7.8,0) 64(7.8,0.5) 65(7.8,1) 66(7.8,1.5) 67(7.8,2) 68(7.8,2.5) 69(7.8,3) 70(7.8,3.5) 71(7.8,4) 72(7.8,4.5) 73(7.8,5) 74(7.8,5.5) 75(7.8,6)
  rrect25% 0.25x1.2 smd: 26(-6,-7.8) 27(-5.5,-7.8) 28(-5,-7.8) 29(-4.5,-7.8) 30(-4,-7.8) 31(-3.5,-7.8) 32(-3,-7.8) 33(-2.5,-7.8) 34(-2,-7.8) 35(-1.5,-7.8) 36(-1,-7.8) 37(-0.5,-7.8) 38(0,-7.8) 39(0.5,-7.8) 40(1,-7.8) 41(1.5,-7.8) 42(2,-7.8) 43(2.5,-7.8) 44(3,-7.8) 45(3.5,-7.8) 46(4,-7.8) 47(4.5,-7.8) 48(5,-7.8) 49(5.5,-7.8) 50(6,-7.8) 76(6,7.8) 77(5.5,7.8) 78(5,7.8) 79(4.5,7.8) 80(4,7.8) 81(3.5,7.8) 82(3,7.8) 83(2.5,7.8) 84(2,7.8) 85(1.5,7.8) 86(1,7.8) 87(0.5,7.8) 88(0,7.8) 89(-0.5,7.8) 90(-1,7.8) 91(-1.5,7.8) 92(-2,7.8) 93(-2.5,7.8) 94(-3,7.8) 95(-3.5,7.8) 96(-4,7.8) 97(-4.5,7.8) 98(-5,7.8) 99(-5.5,7.8) 100(-6,7.8)
  silkscreen extent -8.29,-7 7,7, body extent -8,-8 8,8, height 1.59
"OSC 2016-4P" [mm]
  rrect10% 0.9x0.8 smd: 1(-0.7,-0.55) 2(0.7,-0.55) 3(0.7,0.55) 4(-0.7,0.55)
  silkscreen extent -1.7,-1.5 1.4,1.2, body extent -1,-0.8 1,0.8, height 0.47
QFN50P600X600X80-41N-D [mm]
  rect 0.85x0.25 smd: 1(-2.95,2.25) 2(-2.95,1.75) 3(-2.95,1.25) 4(-2.95,0.75) 5(-2.95,0.25) 6(-2.95,-0.25) 7(-2.95,-0.75) 8(-2.95,-1.25) 9(-2.95,-1.75) 10(-2.95,-2.25) 21(2.95,-2.25) 22(2.95,-1.75) 23(2.95,-1.25) 24(2.95,-0.75) 25(2.95,-0.25) 26(2.95,0.25) 27(2.95,0.75) 28(2.95,1.25) 29(2.95,1.75) 30(2.95,2.25)
  rect 0.25x0.85 smd: 11(-2.25,-2.95) 12(-1.75,-2.95) 13(-1.25,-2.95) 14(-0.75,-2.95) 15(-0.25,-2.95) 16(0.25,-2.95) 17(0.75,-2.95) 18(1.25,-2.95) 19(1.75,-2.95) 20(2.25,-2.95) 31(2.25,2.95) 32(1.75,2.95) 33(1.25,2.95) 34(0.75,2.95) 35(0.25,2.95) 36(-0.25,2.95) 37(-0.75,2.95) 38(-1.25,2.95) 39(-1.75,2.95) 40(-2.25,2.95)
  rect 4.25x4.25 smd: 41(0,0)
  silkscreen extent -3.5,2.88 -3.25,3.12, body extent -3,-3 3,3, height 1
"R 0603_L" [mm] "1/10W贴片电阻                 淘宝ID:黄晶宝石"
  rect 0.7x0.8 smd: 1(-0.65,0) 2(0.65,0)
  silkscreen extent -1.25,-0.65 1.25,0.65, body extent -0.8,-0.4 0.8,0.4, height 0.4
"R 2512_L" [mm] "1W贴片电阻"
  rect 1.65x3.2 smd: 1(-3,0) 2(3,0)
  silkscreen extent -4.2,-2 4.2,2, body extent -3.2,-1.6 3.2,1.6, height 0.55
SMD_TS-1089S [mm]
  rrect10% 1.3x0.7 smd: 1(-2.25,1.075) 1(2.25,1.075) 2(-2.25,-1.075) 2(2.25,-1.075)
  silkscreen extent -2.6,-1.65 2.6,1.65, body extent -2.55,-1.63 2.65,1.63, height 2.5
SOIC-8N [mm]
  rect 1.5x0.65 smd: 1(-2.725,1.905) 2(-2.725,0.635) 3(-2.725,-0.635) 4(-2.725,-1.905) 5(2.725,-1.905) 6(2.725,-0.635) 7(2.725,0.635) 8(2.725,1.905)
  silkscreen extent -3.5,-2.44 1.6,2.58, body extent -3,-2.43 3.02,2.46, height 1.73
SOT-23-5 [mm]
  rect 0.5x1 smd: 1(-0.95,-1.2) 2(0,-1.2) 3(0.95,-1.2) 4(0.95,1.2) 5(-0.95,1.2)
  silkscreen extent -1.5,-0.8 1.5,0.8, body extent -1.45,-1.37 1.45,1.38, height 1.3
SOT-23-5L [mm]
  rect 0.45x0.9 smd: 1(-0.95,-1.2) 2(0,-1.2) 3(0.95,-1.2) 4(0.95,1.2) 5(-0.95,1.2)
  silkscreen extent -1.5,-0.8 1.5,0.8, body extent -1.45,-1.37 1.45,1.38, height 1.3
TP_RECT_2x2#1 [mm]
  rrect20% 2x2 smd: 1(0,0)
TP_RECT_2x2#2 [mm]
  rrect20% 4.5x2 smd: 1(0,0)
TP_RECT_2x2#3 [mm]
  rrect20% 3x3 smd: 1(0,0)
TP_RECT_2x2#4 [mm]
  rrect20% 2.2x3.7 smd: 1(0,0)

## Part data
C1 C2 C3 C4 C5 C6 C7 C8 C9 C10 C11 C12 C13 C14 C15 C16 C17 C18 C19 C20 C21 C22 C23 C24 C25 C26 C27 C28 C29 C30 C31 C32 C33 C34 C35 C36 C37 C38 C39 C40 C41 C42 C43 C44 C45 C46 C47 C48 C49 C50 C51 C52 C53 C54 C55 C56 C57 C58 C59 C60 C61 C62 C63 C64 C65 C66 C67: library part C, "贴片电容", BOM名称=无极性贴片电容
J1 J3 J4 J5 J6 J7: "GH1.25-4P 卧贴"
J2: "GH1.25-6P 卧贴"
LED1: library part LED_G, "贴片LED 0603 绿色"
LED2 LED3: library part LED_R, "贴片LED 0603 红色"
Q1 Q2 Q3 Q4 Q5 Q6: library part NCEP01ND35AG, "NMOS，100V，35A，2 channel"
R1 R2 R3 R4 R5 R6 R7 R8 R9 R10 R11 R12 R13 R14 R15 R16 R17 R18 R19 R20 R21 R22 R23 R24 R25 R26 R27 R28 R29 R30 R31 R32 R33 R34 R35 R36 R37 R38 R39 R40 R41 R42 R43 R44 R45 R46 R47 R48 R49 R50 R51 R52 R53 R54 R55 R56 R57 R58 R59 R60 R61 R62 R63 R64 R65 R66 R67 R68 R69 R70 R71 R72 R73 R74: library part R, "贴片电阻", BOM名称=贴片电阻
TP1 TP2 TP3 TP4 TP5 TP6 TP7 TP8 TP9 TP10 TP11 TP12: library part TP
U1: "STM32G4系列微处理器"
U2 U3: "RS485"
U4: "CAN收发器，5Mbps"
U6: "RS422，3.3V/5V，20Mbps"
U7 U8: "三相智能栅极驱动器", Manufacturer_Name="Texas Instruments", Manufacturer_Part_Number=DRV8323, Datasheet Link=https://www.ti.com/lit/ds/symlink/drv8323.pdf?ts=1615227518000&ref_url=https%253A%252F%252Fwww.google.com%252F, Height=0.8mm
V1 V2 V3 V4 V5: "功率电子开关"
X1: library part X201616MOB4SI, "4脚无源晶振，负载电容12pF", BOM名称=4脚无源晶振

## Free pads (board coordinates)
  round 196.85 hole 118.11 unplated: 1(118.11,118.11) 1(118.11,2047.24) 1(3031.5,118.11) 1(3031.5,2047.24)

## Via types
v1: diameter 24, hole 12, Top Layer to Bottom Layer, tented both sides, 434 vias

## Nets (pads, with @x,y where several pads share a name; then routed paths per layer and width w, separated by ;. In a path a pad name is that pad's centre, name@x,y a point inside that pad or via, vN(x,y) a via of type N, cw(c..) or ccw(c..) an arc to the next point about the centre after c; other vN are vias at no path point)
CAN1_H: J5.2 R14.1 U4.7 | length 356.4
  Top Layer w5: v1(1332.68,1899.61) 1316.43,1883.35 1314.96,1881.89 1314.96,1877.75 1315.75,1861.22 cw(c1295.28,1860.24) 1315.77,1859.92 1314.96,1807.22 1314.96,1803.08 1316.43,1801.61 1337.51,1780.53 1337.51,1778.56 1348.79,1767.28 R14.1@1350.76,1767.28 1362.03,1756.01 1373.7,1756.01 1376.63,1753.08 1376.63,1736.56 1381.01,1732.19 1381.01,1723.61 1374.21,1716.81 U4.7@1374.21,1712.87 ; v1(1381.89,1905.51) 1385.84,1905.51 1397.66,1917.32 1400.61,1917.32 1403.54,1920.25 1403.54,1963.58 J5.2@1402.56,1964.57
  Bottom Layer w5: v1(1332.68,1899.61) 1336.31,1903.24 1344.8,1903.24 1347.07,1905.51 v1(1381.89,1905.51)
CAN1_L: J5.3 R15.2 U4.6 | length 392.8
  Top Layer w5: J5.3@1353.35,1964.57 1361.22,1972.44 1372.66,1972.44 1375.59,1969.51 1375.59,1934.15 1362.2,1920.77 1362.2,1911.42 1354.33,1903.54 1353.35,1903.54 1353.35,1894.69 1369.59,1878.44 1372.54,1878.44 1375.88,1881.79 1380.02,1881.79 1393.7,1868.11 1393.7,1856.3 1389.76,1852.36 1385.83,1852.36 1385.83,1775.59 1393.7,1767.72 1414.07,1767.72 R15.2@1414.5,1767.29 1403.22,1756.01 1391.56,1756.01 1388.63,1753.08 1388.63,1747.31 1402.3,1747.31 1405.51,1744.09 1405.51,1739.15 1402.58,1736.22 1398.85,1736.22 1393.01,1730.38 1393.01,1723.61 1399.8,1716.81 U4.6@1399.8,1712.87
CAN1_PWR_EN: R16.1 U1.96 V3.4 | length 486.2
  Top Layer w8: U1.96@1417.32,1375.98 1417.32,1431.1 v1(1438.98,1452.76) ; v1(1643.7,1663.39) V3.4@1643.7,1631.89 1690.95,1631.89 1700.79,1641.73 R16.1@1702.76,1641.73
  Bottom Layer w8: v1(1438.98,1452.76) 1438.98,1476.38 1625.87,1663.27 1643.59,1663.27 v1(1643.7,1663.39)
CAN1_RX: U1.82 U4.4 | length 582.3
  Top Layer w8: U4.4@1425.39,1602.64 1427.17,1600.87 1427.17,1587.36 1431.85,1582.68 1755.16,1582.68 1759.84,1577.99 1759.84,1488.07 1692.91,1421.15 U1.82@1692.91,1375.98
CAN1_TX: U1.83 U4.1 | length 634.4
  Top Layer w8: U4.1@1348.62,1602.64 1348.62,1575.08 1366.17,1557.53 1735.25,1557.53 1742.13,1550.65 1742.13,1490.16 1673.23,1421.26 U1.83@1673.23,1375.98
ENC1_A: J1.2 R2.1 R5.2 U2.6 | length 828.8
  Top Layer w5: R5.2@287.4,1661.42 285.43,1661.42 274.15,1650.14 274.15,1637.87 271.22,1634.94 267.08,1634.94 236.22,1665.8 236.22,1835.65 239.15,1838.58 400.45,1838.58 417.96,1856.09 423.44,1856.09 427.06,1852.46 431.2,1852.46 440.84,1862.1 440.84,1866.24 435.46,1871.63 435.46,1873.59 439.07,1877.2 439.07,1933.16 442,1936.09 448.4,1936.09 457.68,1945.37 J1.2@457.68,1964.57 ; R5.2@288.12,1661.42 299.4,1650.14 299.4,1637.87 302.33,1634.94 311.44,1634.94 327.84,1618.54 327.84,1584.78 335.75,1576.87 340.12,1576.87 343.05,1579.8 343.05,1585.18 354.33,1596.46 R2.1@356.3,1596.46 ; R2.1@357.81,1596.46 369.09,1585.18 369.09,1579.8 372.02,1576.87 432.18,1576.87 438.98,1583.66 U2.6@442.91,1583.66
ENC1_B: J1.3 R1.1 R2.2 U2.7 | length 831.4
  Top Layer w5: R1.1@287.4,1596.46 285.43,1596.46 274.15,1607.74 274.15,1620.01 271.22,1622.94 262.11,1622.94 224.22,1660.83 224.22,1840.62 234.18,1850.58 395.48,1850.58 427.07,1882.17 427.07,1933.16 424.14,1936.09 417.74,1936.09 408.46,1945.37 J1.3@408.46,1964.57 ; R1.1@288.12,1596.46 299.4,1607.74 299.4,1620.01 302.33,1622.94 306.47,1622.94 315.84,1613.57 315.84,1579.81 330.78,1564.87 340.12,1564.87 343.05,1561.94 343.05,1556.56 354.33,1545.28 R2.2@356.3,1545.28 ; R2.2@357.81,1545.28 369.09,1556.56 369.09,1561.94 372.02,1564.87 432.18,1564.87 438.98,1558.07 U2.7@442.91,1558.07
ENC1_PWR_EN: R3.1 U1.97 V1.4 | length 1266.5
  Top Layer w8: v1(541.34,1490.16) 624.4,1490.16 689.36,1425.2 1084.65,1425.2 1125.98,1466.54 1354.33,1466.54 1397.64,1423.23 U1.97@1397.64,1375.98 ; V1.4@545.28,1690.94 547.24,1692.91 R3.1@606.3,1692.91 ; v1(594.49,1622.05) 594.49,1679.13 599.49,1684.13 599.49,1686.1 R3.1@606.3,1692.91 ; R3.1@606.3,1692.91 608.27,1694.88 R3.1@610.24,1694.88 608.27,1692.91 R3.1@606.3,1692.91
  Bottom Layer w8: v1(541.34,1490.16) 541.34,1517.72 594.49,1570.87 v1(594.49,1622.05)
ENC2_A: J4.2 R8.1 R13.2 U3.6 | length 379.2
  Top Layer w5: J4.2@1875,1964.57 1875,1945.37 1865.72,1936.09 1859.32,1936.09 1856.39,1933.16 1856.39,1904.9 1895.58,1865.71 1895.58,1811.02 1898.51,1808.09 1910.8,1808.09 R8.1@1922.08,1796.81 1931.5,1787.4 1947.68,1787.4 1960.76,1774.32 1960.76,1769.99 1985.12,1745.63 R13.2@1987.08,1745.63 1975.8,1734.35 1963.51,1734.35 1960.58,1731.42 1960.58,1723.71 1964.11,1720.18 1964.11,1701.95 1970.91,1695.16 U3.6@1970.91,1691.22
ENC2_B: J4.3 R6.1 R8.2 U3.7 | length 376.7
  Top Layer w5: J4.3@1825.79,1964.57 1825.79,1945.37 1835.06,1936.09 1841.46,1936.09 1844.39,1933.16 1844.39,1899.93 1883.58,1860.74 1883.58,1811.02 1880.65,1808.09 1868.36,1808.09 R6.1@1857.08,1796.81 1859.05,1796.81 1898.95,1756.91 1910.8,1756.91 R8.2@1922.08,1745.63 1933.36,1734.35 1945.65,1734.35 1948.58,1731.42 1948.58,1718.74 1952.11,1715.21 1952.11,1701.95 1945.32,1695.16 U3.7@1945.32,1691.22
ENC2_PWR_EN: R9.1 U1.98 V2.4 | length 1292
  Top Layer w8: U1.98@1377.95,1375.98 1377.95,1326.77 v1(1474.41,1230.32) ; v1@1972.62,1407.66 2179.13,1614.17 2222.44,1614.17 2239.33,1631.06 V2.4@2239.33,1668.82 2283.31,1668.82 2300.12,1685.63 R9.1@2302.09,1685.63
  Bottom Layer w8: v1(1474.41,1230.32) 1517.72,1230.32 1547.24,1200.79 1840.55,1200.79 1972.44,1332.68 v1(1972.44,1407.48)
GND: C1.2 C2.2 C3.2 C4.2 C5.2 C6.2 C7.2 C8.2 C10.1 C12.1 C13.2 C14.1 C15.1 C16.1 C17.1 C18.1 C19.1 C20.1 C21.1 C22.2 C23.2 C24.2 C25.2 C26.2 C27.2 C28.1 C29.2 C30.2 C38.1 C39.1 C56.1 C57.1 J1.4 J1.G1 J1.G2 J2.6 J2.G1 J2.G2 J3.4 J3.G1 J3.G2 J4.4 J4.G1 J4.G2 J5.4 J5.G1 J5.G2 J6.G1 J6.G2 J7.3 J7.4 J7.G1 J7.G2 LED1.2 R4.1 R5.1 R10.1 R11.2 R12.2 R13.1 R17.1 R18.2 R24.1 R26.1 R28.1 R30.1 R47.2 R48.1 R50.2 R51.2 R68.2 R69.1 R71.2 R72.2 S1.1 TP4.1 U1.23 U1.35 U1.48 U1.63 U1.74 U1.99 U2.5 U2.9 U3.5 U3.9 U4.2 U4.9 U5.1 U5.2 U5.3 U5.4 U5.7 U6.4 U6.9 U7.32 U8.32 V1.2 V2.2 V3.2 V4.2 V5.2 V6.2 V7.2 X1.2 X1.4 | length 5461.3
  Top Layer w8: U7.32@551.93,1146.5 552.85,1147.42 552.85,1167.02 557.53,1171.71 558.87,1171.71 565.2,1178.04 581.58,1178.04 v1(584.65,1181.1) ; R50.2@588.19,1329.84 588.58,1330.24 v1(588.58,1370.08) ; R51.2@795.27,1324.42 816.55,1324.42 v1(862.2,1370.08) ; C39.1@1122.05,1279.53 1155.12,1279.53 1162.99,1271.65 v1(1167.32,1271.65) ; v1(1185.04,862.2) 1189.37,862.2 1199.21,872.05 U1.23@1267.72,872.05 ; C16.1@1283.46,1657.48 1283.73,1657.76 v1(1387.01,1657.76) ; U1.99@1358.27,1375.98 1358.27,1409.18 1366.14,1417.06 v1(1366.14,1421.26) ; v1(1401.57,1466.54) 1404.64,1469.6 1404.64,1477.72 1411.17,1484.25 1530.74,1484.25 1535.43,1479.57 R12.2@1535.43,1444.88 ; C18.1@1478.26,1767.28 1478.26,1714.66 R17.1@1486.22,1706.7 ; v1(1494.09,710.63) 1496.06,712.6 1509.09,712.6 1515.75,719.25 U1.35@1515.75,761.81 ; v1(1753.94,814.96) 1771.65,797.24 U1.48@1771.65,761.81 ; v1@1796.85,525.59 1802.76,531.5 v1(1807.09,531.5) ; U1.63@1881.89,1068.9 v1(1925.2,1068.9) ; U1.74@1881.89,1285.43 1919.29,1285.43 1931.1,1297.24 1931.1,1330.71 v1(1933.07,1332.68) ; U8.32@2620.08,994.09 2649.61,994.09 v1(2655.51,988.19) ; v1(2820.87,1112.2) 2814.96,1106.3 2814.96,1010.59 2819.65,1005.91 2828.74,1005.91 2864.18,970.47 R72.2@2864.18,968.5 ; J3.G1@3080.71,1390.75 3096.59,1390.75 3112.2,1406.36 v1(3112.2,1448.82)
  Top Layer w20: v1(22,1687.01) 22.76,1687.77 61.7,1687.77 C30.2@64.61,1690.68 C29.2@64.61,1754.43 ; v1(22,1748.8) 22.76,1749.56 61.6,1749.56 64.61,1752.57 C28.1@64.6,1818.18 64.29,1817.86 22.31,1817.86 v1(22,1817.55) ; LED1.2@135.63,1554.27 135.63,1517.03 137.8,1514.86 v1(137.8,1513.78) ; J1.G2@286.42,2090.55 286.42,2100.55 296.1,2110.24 v1(334.65,2110.24) ; C38.1@403.18,1329.85 405.15,1329.85 408.93,1333.63 408.93,1366.51 419.29,1376.87 v1(419.29,1377.95) ; R47.2@463.19,1329.84 465.16,1329.84 468.94,1333.62 468.94,1363.52 484.25,1378.84 v1(484.25,1379.92) ; J1.G1@579.72,2090.55 579.72,2100.55 589.41,2110.24 v1(627.95,2110.24) ; v1(692.91,1791.34) 692.91,1790.26 710.63,1772.54 710.63,1765.75 744.09,1765.75 C20.1@746.07,1763.78 ; v1(704.72,1578.74) 720.79,1562.67 C3.2@764.27,1562.67 C1.2@843.33,1562.67 C7.2@922.39,1562.67 C5.2@1001.45,1562.67 ; v1(710.63,1679.13) 711.71,1679.13 721.55,1688.97 C4.2@764.27,1688.97 C2.2@843.33,1688.97 C8.2@922.39,1688.97 C6.2@1001.45,1688.97 1005.23,1685.19 1042.07,1685.19 1052.07,1675.2 v1(1053.15,1675.2) ; J6.G2@758.86,2090.55 758.86,2100.55 768.54,2110.24 v1(807.09,2110.24) ; v1(1029.53,866.14) R30.1@1105.31,866.14 1109.09,862.37 1142.88,862.37 1143.04,862.2 v1(1185.04,862.2) ; J6.G1@1052.17,2090.55 1052.17,2100.55 1061.85,2110.24 v1(1100.39,2110.24) ; C15.1@1085.41,1172.03 1084.8,1171.41 1084.8,1157.81 1084.72,1157.73 X1.4@1084.72,1096.65 1082.76,1096.65 1060.1,1119.31 1048.01,1119.31 v1(1047.24,1120.08) 1046.48,1119.31 1024.82,1119.31 1005.9,1100.4 C14.1@1003.93,1100.4 1003.93,1141.63 1037.5,1175.19 C15.1@1088.58,1175.19 ; v1(1116.14,1019.68) 1116.14,1020.77 1132.13,1036.75 1132.13,1047.6 1137.87,1053.35 X1.2@1139.84,1053.35 ; J5.G2@1231.3,2090.55 1231.3,2100.55 1240.98,2110.24 v1(1279.53,2110.24) ; v1(1263.78,161.42) 1264.27,160.93 1264.27,65.45 J7.G1@1264.76,64.96 ; C26.2@1364.17,610.24 1387.8,610.24 ; V7.2@1383.86,545.28 1383.86,606.3 1387.8,610.24 ; C27.2@1421.26,610.24 1387.8,610.24 ; J7.3@1436.02,190.94 J7.4@1485.24,190.94 ; v1(1484.25,129.92) 1484.74,130.41 1484.74,190.45 J7.4@1485.24,190.94 ; J5.G1@1524.61,2090.55 1524.61,2100.55 1534.29,2110.24 v1(1572.83,2110.24) ; v1(1529.53,183.07) 1528.45,183.07 1520.57,190.94 J7.4@1485.24,190.94 ; C17.1@1547.91,1818.47 1594.94,1818.47 1597.34,1820.87 v1(1598.43,1820.87) ; v1(1553.15,151.57) 1553.15,150.49 1558.07,145.57 J7.G2@1558.07,64.96 ; R28.1@1568.89,360.24 1570.86,360.24 1586.46,344.65 1627.79,344.65 V5.2@1627.95,344.49 1628.11,344.33 1660.49,344.33 1674.11,330.71 v1(1675.2,330.71) 1675.2,329.63 1677.17,327.66 v1(1677.17,275.59) ; V6.2@1651.57,545.28 1652.72,546.42 1652.72,576.83 1653.54,577.66 v1(1653.54,578.74) 1654.31,579.51 1654.31,609.04 C25.2@1655.51,610.24 C24.2@1714.57,610.24 ; J4.G2@1703.74,2090.55 1703.74,2100.55 1713.43,2110.24 v1(1751.97,2110.24) ; C22.2@1748.03,525.59 v1@1796.85,525.59 ; v1(1986.22,1836.61) 1986.65,1836.18 1986.65,1797.25 R13.1@1987.08,1796.81 ; J4.G1@1997.05,2090.55 1997.05,2100.55 2006.73,2110.24 v1(2045.28,2110.24) ; C12.1@2077.08,1796.81 2077.97,1797.71 2077.97,1837.82 v1(2078.74,1838.58) ; J2.G2@2176.18,2090.55 2176.18,2100.55 2185.87,2110.24 v1(2224.41,2110.24) ; v1@2344.31,1591.26 U5.4@2405.98,1591.26 ; U5.3@2405.98,1641.26 U5.2@2405.98,1691.26 U5.1@2405.98,1741.26 2457.56,1741.26 v1(2492.13,1706.69) ; v1(2555.12,1687.01) 2556.2,1687.01 2560.45,1691.26 U5.7@2620.55,1691.26 ; J2.G1@2567.91,2090.55 J2.G1@2567.91,2100.55 ; v1(2903.54,1639.76) 2904.53,1639.76 2933.07,1611.22 J3.4@2954.72,1611.22 ; R69.1@2913.39,1169.29 2947.73,1169.29 2957.58,1179.13 v1(2958.66,1179.13) ; 3078.74,1738.19 3078.74,1686.02 J3.G2@3080.71,1684.06
  Layer 2 w8: v1(2655.51,988.19) 2655.51,986.9 2671.94,970.47 2716.54,970.47 2783.46,1037.4 2783.46,1098.43 2796.87,1111.83 2820.49,1111.83 v1(2820.87,1112.2)
  Bottom Layer w8: v1(1366.14,1421.26) 1398.51,1453.63 1398.51,1463.47 v1(1401.57,1466.54)
  Bottom Layer w20: v1(419.29,1377.95) 481.2,1377.95 483.17,1379.92 v1(484.25,1379.92) 577.66,1379.92 587.5,1370.08 v1(588.58,1370.08)
  other v1: 1484.25,96.46 1263.78,194.88 1037.4,1011.81 1185.04,1129.92 3041.34,1133.86 2000,1338.58 3074.8,1448.82 3074.8,1482.28 3112.2,1482.28 2338.58,1582.68 2492.13,1673.23 3052.17,1786.61 3102.17,1786.61 3052.17,1836.61 3102.17,1836.61 57.09,1873.23 107.09,1873.23 57.09,1923.23 107.09,1923.23 334.65,2060.24 384.65,2060.24 627.95,2060.24 677.95,2060.24 807.09,2060.24 857.09,2060.24 1100.39,2060.24 1150.39,2060.24 1279.53,2060.24 1329.53,2060.24 1572.83,2060.24 1622.83,2060.24 1751.97,2060.24 1801.97,2060.24 2045.28,2060.24 2095.28,2060.24 2224.41,2060.24 2273.52,2060.77 384.65,2110.24 677.95,2110.24 857.09,2110.24 1150.39,2110.24 1329.53,2110.24 1622.83,2110.24 1801.97,2110.24 2095.28,2110.24 2274.41,2110.24
I2C3_SCL: R19.1 U1.69 U5.6 | length 1011.6
  Top Layer w8: U1.69@1881.89,1187.01 1920.69,1187.01 2292.74,1559.06 2440.94,1559.06 2523.15,1641.26 U5.6@2620.55,1641.26 2677.84,1641.26 2695.86,1659.29 R19.1@2695.86,1661.26
I2C3_SDA: R20.1 U1.68 U5.5 | length 991.6
  Top Layer w8: U1.68@1881.89,1167.32 1920.8,1167.32 2296.79,1543.31 2464.57,1543.31 2512.52,1591.26 U5.5@2620.55,1591.26 2690.87,1591.26 R20.1@2695.86,1596.26
M1_CAL: R47.1 U1.7 U7.31 | length 963.1
  Top Layer w8: R47.1@463.19,1278.66 463.19,1253.28 467.88,1248.6 554.78,1248.6 607.41,1195.97 618.99,1195.97 v1(622.05,1192.91) 622.05,1153.54 615,1146.5 U7.31@571.61,1146.5 ; v1(927.17,1192.91) 928.04,1192.91 943.79,1208.66 1206.69,1208.66 1228.35,1187.01 U1.7@1267.72,1187.01
  Bottom Layer w8: v1(622.05,1192.91) v1(927.17,1192.91)
M1_ENABLE: U1.8 U7.30 | length 703.3
  Top Layer w8: U7.30@599.17,1118.94 610.98,1118.94 632.68,1140.64 638.67,1140.64 v1(641.73,1143.7) ; v1(1194.88,1185.04) 1212.6,1167.32 U1.8@1267.72,1167.32
  Bottom Layer w8: v1(641.73,1143.7) 646.06,1143.7 651.97,1149.61 1159.45,1149.61 v1(1194.88,1185.04)
M1_GAIN: R49.2 U7.29 | length 316.4
  Top Layer w8: R49.2@523.18,1278.67 532.96,1268.89 554.29,1268.89 581.05,1242.13 606.3,1242.13 671.26,1177.17 671.26,1139.76 630.83,1099.33 U7.29@599.17,1099.26 U7.29@599.17,1099.26
M1_GHA: Q1.4 U7.6 | length 763.6
  Top Layer w8: v1(296.96,1033.82) 301.29,1033.82 314.6,1020.52 U7.6@366.89,1020.52
  Top Layer w15: v1(322.83,407.48) 326.57,403.74 Q1.4@326.57,366.14
  Bottom Layer w15: v1(296.96,1033.82) 296.96,1029.49 289.37,1021.9 289.37,911.42 298.77,902.02 298.77,899.82 325.12,873.47 325.12,661.88 322.83,659.6 v1(322.83,407.48)
M1_GHB: Q2.4 U7.15 | length 621.1
  Top Layer w8: v1(468.5,862.2) 468.5,866.53 473.19,871.22 U7.15@473.19,914.22
  Top Layer w15: v1(614.17,405.51) 617.23,402.45 623.85,402.45 630.71,395.59 Q2.4@630.71,366.14
  Bottom Layer w15: v1(468.5,862.2) 468.5,721.06 505.91,683.66 505.91,515.75 614.17,407.48 v1(614.17,405.51)